# EAGLE board Eagle (EAGLE 9.0.0)

Size 100 x 80 mm. Coordinates in mm from the lower left corner, seen from the top.
Outline: 0,0 100,0 100,80 0,80 0,0
Copper layers (1*16): Top 0.035mm / dielectric 1.5mm / Bottom 0.035mm
Design rules "default": minimum track width 6mil, minimum drill 0.35mm, track to track 6mil, track to pad 6mil, pad to pad 6mil, via to via 6mil, smd to smd 6mil, copper to edge 40mil, drill to drill 6mil, minimum pad ring 10mil, minimum via ring 8mil, stop-mask expansion 4mil, vias tented up to drill 0mil, thermal gap 10mil

## Footprints (pad centres in the part's own frame; a part is rotated, then mirrored left to right if it is on the bottom)
DIL14 = drill 0.813 long: 1 -7.62,-3.81; 2 -5.08,-3.81; 3 -2.54,-3.81; 4 0,-3.81; 5 2.54,-3.81; 6 5.08,-3.81; 7 7.62,-3.81; 8 7.62,3.81; 9 5.08,3.81; 10 2.54,3.81; 11 0,3.81; 12 -2.54,3.81; 13 -5.08,3.81; 14 -7.62,3.81
C2.5-2 = drill 0.813 pad 1.6 octagon: 1 -1.27,0; 2 1.27,0
7SEG-13 = drill 0.813 long: 1 -5.08,-7.62; 2 -2.54,-7.62; 3 0,-7.62; 4 2.54,-7.62; 5 5.08,-7.62; 6 5.08,7.62; 7 2.54,7.62; 8 0,7.62; 9 -2.54,7.62; 10 -5.08,7.62
02P = drill 0.914 long: 1 -1.27,0; 2 1.27,0
DIL16 = drill 0.813 long: 1 -8.89,-3.81; 2 -6.35,-3.81; 3 -3.81,-3.81; 4 -1.27,-3.81; 5 1.27,-3.81; 6 3.81,-3.81; 7 6.35,-3.81; 8 8.89,-3.81; 9 8.89,3.81; 10 6.35,3.81; 11 3.81,3.81; 12 1.27,3.81; 13 -1.27,3.81; 14 -3.81,3.81; 15 -6.35,3.81; 16 -8.89,3.81
DIL08 = drill 0.813 pad 1.27: 1 -3.81,-3.81; 2 -1.27,-3.81; 3 1.27,-3.81; 4 3.81,-3.81; 5 3.81,3.81; 6 1.27,3.81; 7 -1.27,3.81; 8 -3.81,3.81
0204/5 = drill 0.813 octagon: 1 -2.54,0; 2 2.54,0
B3F-10XX = drill 1.016 long: 1 -3.251,2.261; 2 3.251,2.261; 3 -3.251,-2.261; 4 3.251,-2.261

## Placement (x,y rotation side)
ALIMENTACAO_7473_1  74LS73N  [DIL14]  -22.86,6.35 0 top  (outside the outline)
ALIMENTACAO_7473_2  74LS73N  [DIL14]  -43.18,6.35 0 top  (outside the outline)
AND7408  7408N  [DIL14]  -22.86,43.18 0 top  (outside the outline)
C1  10µF  [C2.5-2]  -40.64,53.34 0 top  (outside the outline)
D1  [7SEG-13]  -60.96,10.16 0 top  (outside the outline)
GND  [02P]  -27.94,52.07 0 top  (outside the outline)
IC1  74LS47N  [DIL16]  -44.45,30.48 0 top  (outside the outline)
IC3  LM555N  [DIL08]  -39.37,41.91 0 top  (outside the outline)
NAND7400  7400N  [DIL14]  -22.86,30.48 0 top  (outside the outline)
R1  220  [0204/5]  -33.02,62.23 0 top  (outside the outline)
R2  220  [0204/5]  -40.64,62.23 0 top  (outside the outline)
R3  220  [0204/5]  -48.26,62.23 0 top  (outside the outline)
R4  220  [0204/5]  -55.88,62.23 0 top  (outside the outline)
R5  220  [0204/5]  -63.5,62.23 0 top  (outside the outline)
R6  220  [0204/5]  -16.51,68.58 0 top  (outside the outline)
R7  220  [0204/5]  -24.13,68.58 0 top  (outside the outline)
R8  1k  [0204/5]  -31.75,68.58 0 top  (outside the outline)
RA  6k8  [0204/5]  -39.37,68.58 0 top  (outside the outline)
RB  33k  [0204/5]  -46.99,68.58 0 top  (outside the outline)
RESET  [B3F-10XX]  -19.05,53.34 0 top  (outside the outline)
RESISTOR_PULLUP  1k  [0204/5]  -25.4,62.23 0 top  (outside the outline)
RESISTOR_PULLUP1  1k  [0204/5]  -55.88,52.07 0 top  (outside the outline)
STOP_COUNTER  [B3F-10XX]  -59.69,40.64 0 top  (outside the outline)
VCC  [02P]  -34.29,52.07 0 top  (outside the outline)

## Library data of the parts
ALIMENTACAO_7473_1 ALIMENTACAO_7473_2 = 74xx-us
AND7408 NAND7400 = 74ttl-din
C1 = capacitor-wima
D1 = special
GND VCC = con-amp-quick; OC_FARNELL: unknown; OC_NEWARK: unknown
IC1 = 74xx-eu
IC3 = linear
R1-R8 RA RB RESISTOR_PULLUP RESISTOR_PULLUP1 = rcl; SPICEPREFIX: R
RESET STOP_COUNTER = switch-omron; MPN: B3F-1000; OC_FARNELL: 176432; OC_NEWARK: 36M3542

## Nets
N$1: IC3.7 RA.1 RB.2
N$2: C1.2 IC3.2 IC3.6 RB.1
N$3: AND7408.9 RESET.1 RESET.2 RESISTOR_PULLUP1.1
N$4: ALIMENTACAO_7473_1.11 ALIMENTACAO_7473_2.11 AND7408.7 C1.1 GND.1 GND.2 IC1.8 IC3.1 NAND7400.7 RESET.3 RESET.4 STOP_COUNTER.1 STOP_COUNTER.2
N$5: AND7408.1 IC3.3
N$6: ALIMENTACAO_7473_1.1 AND7408.3
N$7: ALIMENTACAO_7473_1.5 ALIMENTACAO_7473_1.12 IC1.7
N$8: ALIMENTACAO_7473_1.9 ALIMENTACAO_7473_2.1 IC1.1 NAND7400.2
N$9: ALIMENTACAO_7473_2.5 ALIMENTACAO_7473_2.12 IC1.2
N$10: AND7408.2 RESISTOR_PULLUP.1 STOP_COUNTER.3 STOP_COUNTER.4
N$12: AND7408.10 NAND7400.3
N$13: ALIMENTACAO_7473_2.9 IC1.6 NAND7400.1
N$14: IC1.13 R1.1
N$15: ALIMENTACAO_7473_1.2 ALIMENTACAO_7473_1.6 ALIMENTACAO_7473_2.2 ALIMENTACAO_7473_2.6 AND7408.8
N$17: IC1.12 R2.1
N$18: IC1.11 R3.1
N$19: IC1.10 R4.1
N$20: IC1.9 R5.1
N$21: IC1.15 R6.1
N$22: IC1.14 R7.1
N$23: D1.7 R1.2
N$24: D1.6 R2.2
N$25: D1.4 R3.2
N$26: D1.2 R4.2
N$27: D1.1 R5.2
N$28: D1.9 R6.2
N$29: D1.10 R7.2
N$30: IC1.3 IC1.4 IC1.5 R8.2
N$31: ALIMENTACAO_7473_1.3 ALIMENTACAO_7473_1.4 ALIMENTACAO_7473_1.7 ALIMENTACAO_7473_1.10 ALIMENTACAO_7473_1.14 ALIMENTACAO_7473_2.3 ALIMENTACAO_7473_2.4 ALIMENTACAO_7473_2.7 ALIMENTACAO_7473_2.10 ALIMENTACAO_7473_2.14 AND7408.14 D1.3 D1.8 IC1.16 IC3.4 IC3.8 NAND7400.14 R8.1 RA.2 RESISTOR_PULLUP1.2 RESISTOR_PULLUP.2 VCC.1 VCC.2

## Tracks (layer width: path | path; a pad name or v marks a point on that pad's centre or on a via)
N$1  (2 unrouted)
N$2  (3 unrouted)
N$3  (3 unrouted)
N$4  (12 unrouted)
N$5  (1 unrouted)
N$6  (1 unrouted)
N$7  (2 unrouted)
N$8  (3 unrouted)
N$9  (2 unrouted)
N$10  (3 unrouted)
N$12  (1 unrouted)
N$13  (2 unrouted)
N$14  (1 unrouted)
N$15  (4 unrouted)
N$17  (1 unrouted)
N$18  (1 unrouted)
N$19  (1 unrouted)
N$20  (1 unrouted)
N$21  (1 unrouted)
N$22  (1 unrouted)
N$23  (1 unrouted)
N$24  (1 unrouted)
N$25  (1 unrouted)
N$26  (1 unrouted)
N$27  (1 unrouted)
N$28  (1 unrouted)
N$29  (1 unrouted)
N$30  (3 unrouted)
N$31  (22 unrouted)